# Altium PCB JACK_power_tester_(0).PcbDoc
Units mil, origin at the board's own origin, x right, y up, seen from the top; angles counter-clockwise.
Board outline 6000 x 4000 mil, 2 copper layers (Top Layer, Bottom Layer); 4 components, 0 nets, 44 pads, 0 vias.
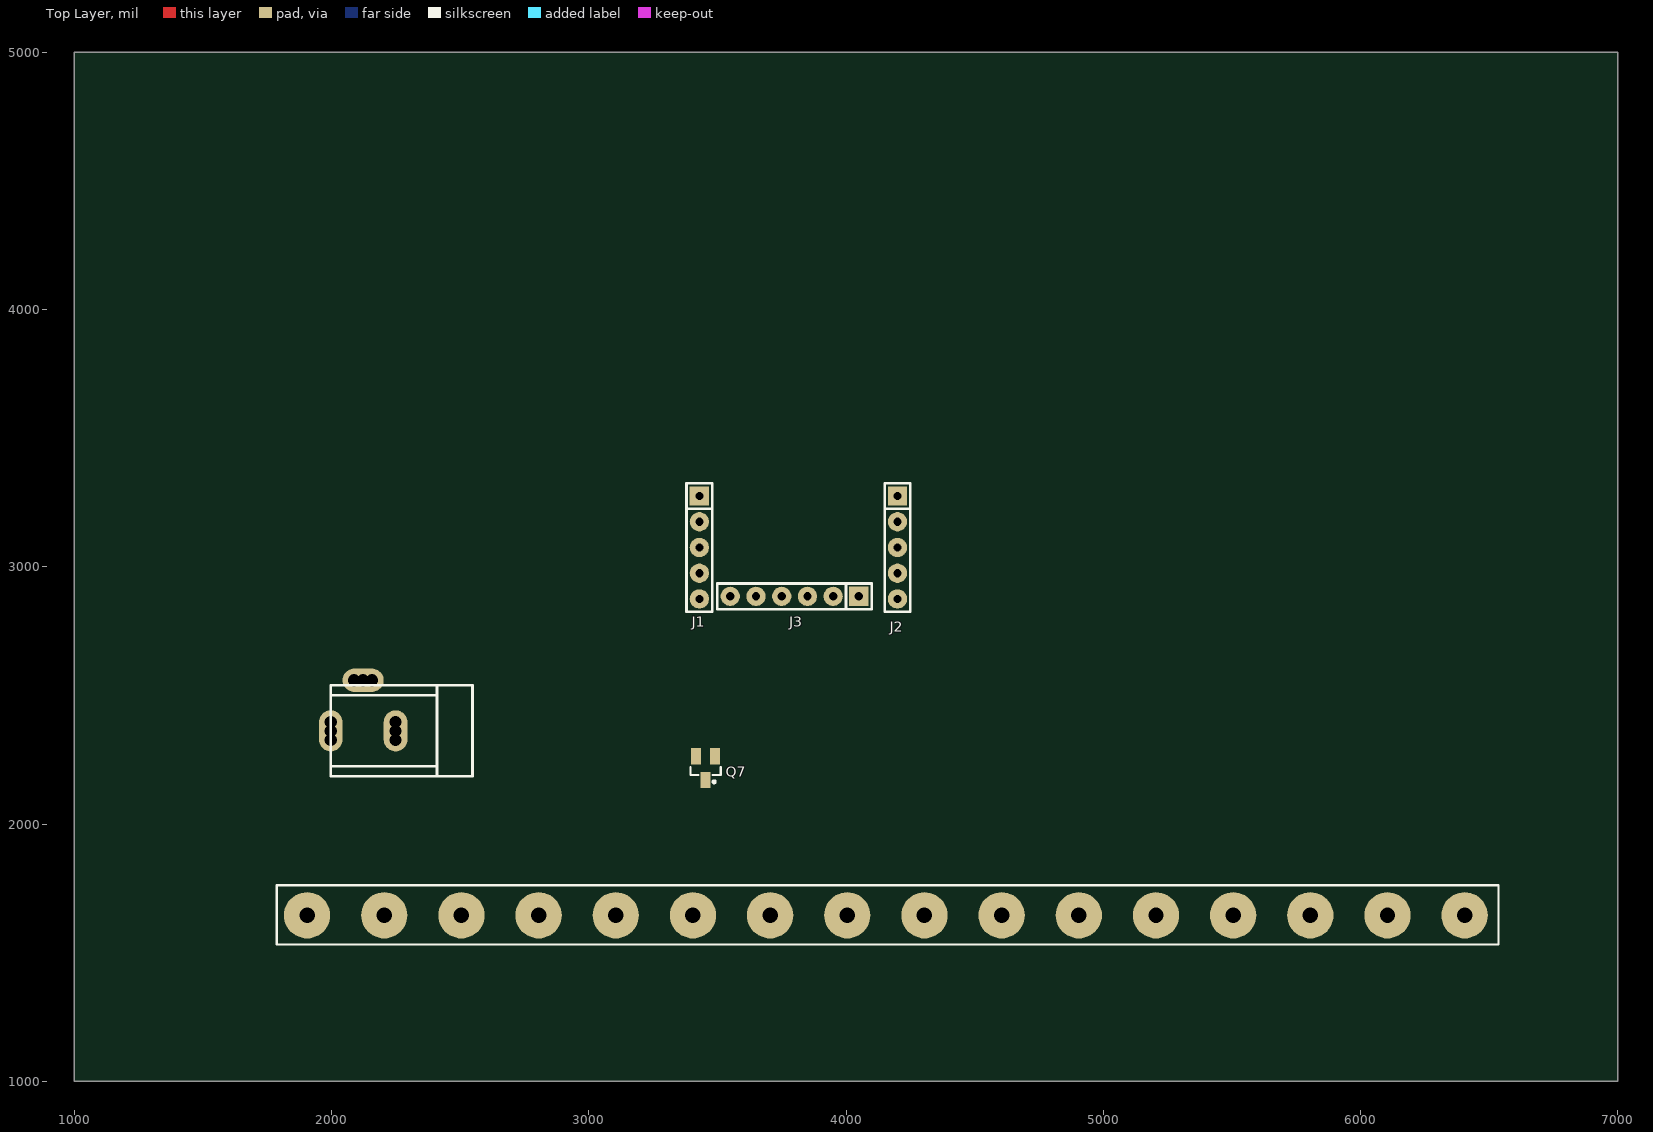
[diagram p0: Top Layer view]
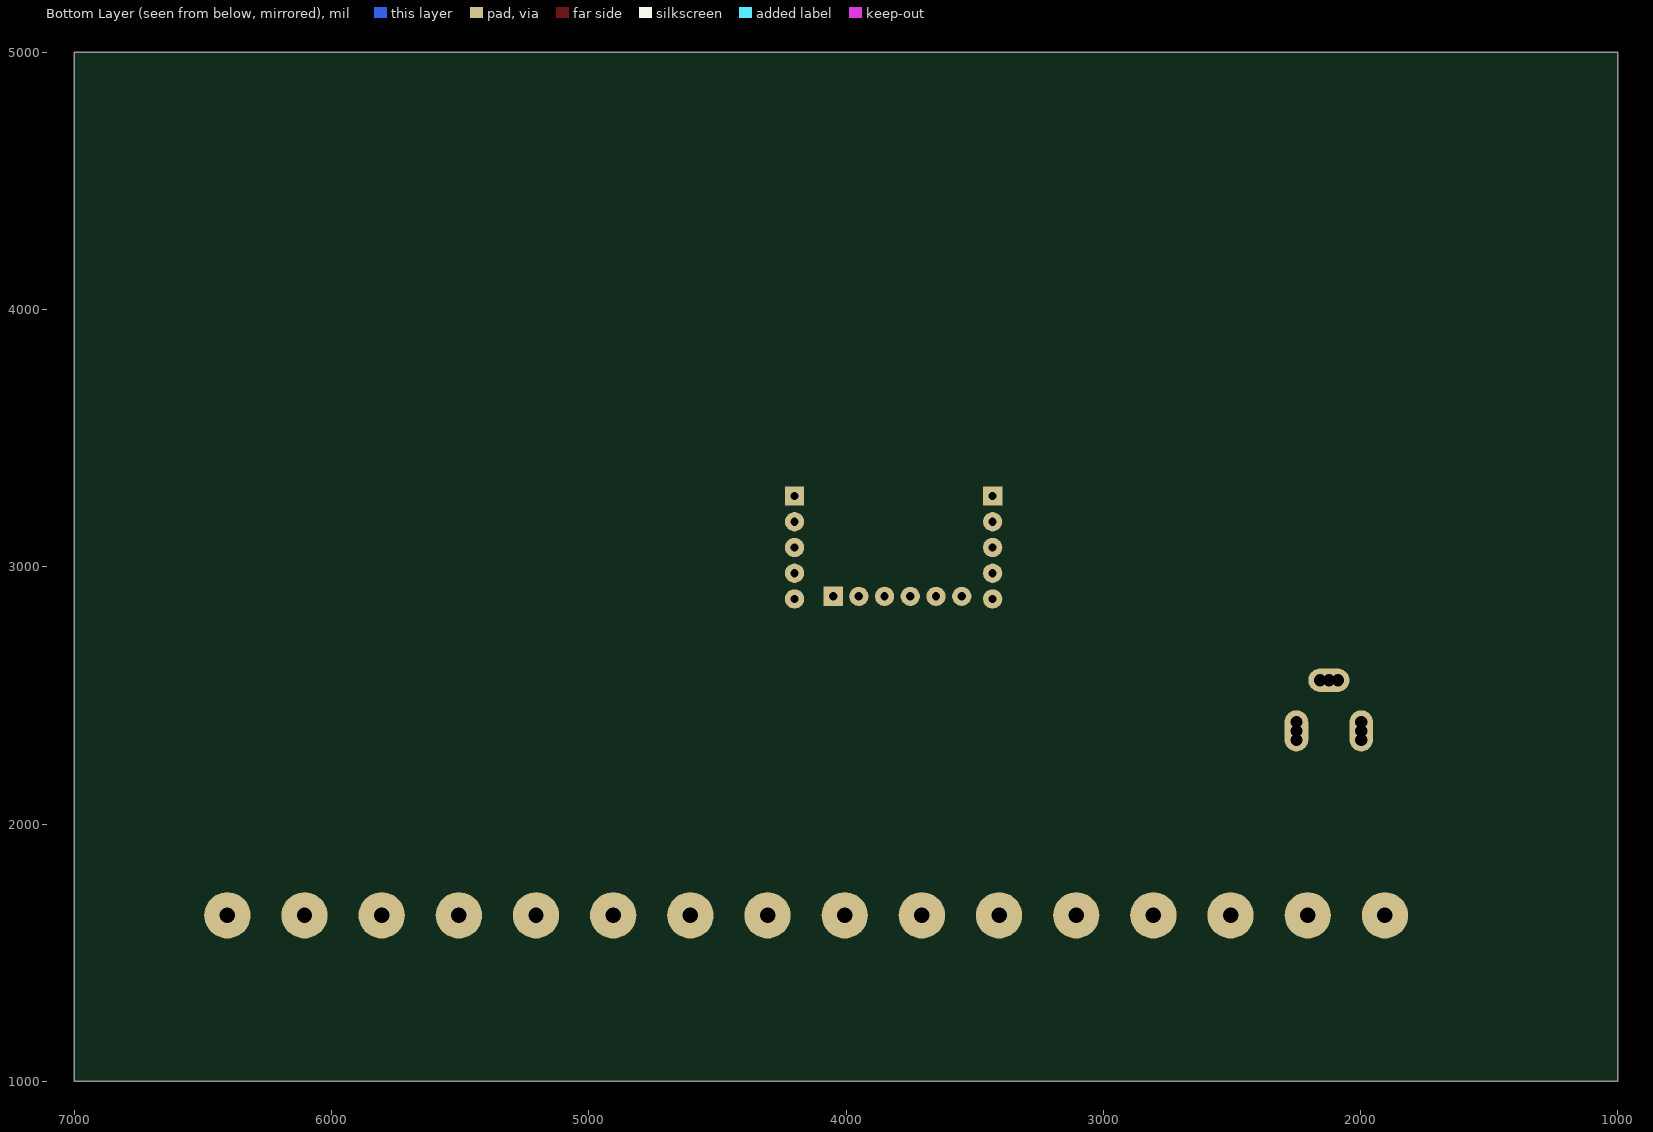
[diagram p1: Bottom Layer view, seen from below]

## Layer stack, top to bottom
Top Solder: solder mask 0.4, Solder Resist, Dk 3.5
Top Layer: signal copper 1.4
Dielectric 1: dielectric 12.6, FR-4, Dk 4.8
Bottom Layer: signal copper 1.4
Bottom Solder: solder mask 0.4, Solder Resist, Dk 3.5

## Board outline
1000,1000 7000,1000 7000,5000 1000,5000

## Design rules (kind name [scope] priority, off if disabled: settings)
Clearance [All] p1: gap=10
PolygonConnect [All] p1: connectstyle=Relief reliefconductorwidth=10 reliefentries=4 polygonreliefangle="90 Angle" airgapwidth=10
RoutingVias [All] p1: holewidth=28 width=50 viastyle="Through Hole" minholewidth=28 minwidth=50 maxholewidth=28 maxwidth=50
SolderMaskExpansion [All] p1: expansion=4
Width [All] p1: maxlimit=10 minlimit=10 preferedwidth=10
30 further rules are at their usual default settings.

## Components (designator, comment, footprint, x,y, rotation, side; value= is the part's Value field where it differs from the comment)
J1 "CON5" SIP5 3430,3075 r90 top
J2 "CON5" SIP5 4200,3075 r90 top
J3 "CON6" SIP6 3800,2885 r0 top
Q7 "2N2222" SOT23_M 3454,2217.26 r270 top

## Footprints (in the part's own frame and the unit in brackets; to place one, negate y for a bottom-side part, rotate by r counter-clockwise, add the part's x,y. Pads: shape width x height; smd on the part's side, far side on the other; paste and mask are expansions set on the pad)
SIP5 [mil]
  rect 75x75 hole 32: 1(200,0)
  round 75 hole 32: 2(100,0) 3(0,0) 4(-100,0) 5(-200,0)
  silkscreen extent -250,-50 250,50
SIP6 [mil]
  rect 75x75 hole 32: 1(250,0)
  round 75 hole 32: 2(150,0) 3(50,0) 4(-50,0) 5(-150,0) 6(-250,0)
  silkscreen extent -300,-50 300,50
SOT23_M [mm] "SOT23, 3-Leads, Body 2.9x1.3mm, Pitch 0.95mm, Lead Span 2.3mm - Reverse Pinning, IPC Low Density"
  rect 1.6x1 smd: 1(1.175,0) 2(-1.175,-0.95) 3(-1.175,0.95)
  silkscreen extent -0.1,-1.5 1.47,1.5, body extent -0.7,-1.5 0.7,1.5, height 1.1

## Part data
Q7: "General Purpose Transistor NPN Silicon"

## Free pads (board coordinates)
  round 180 hole 60: 1(1905,1645) 2(2205,1645) 3(2505,1645) 4(2805,1645) 5(3105,1645) 6(3405,1645) 7(3705,1645) 8(4005,1645) 9(4305,1645) 10(4605,1645) 11(4905,1645) 12(5205,1645) 13(5505,1645) 14(5805,1645) 15(6105,1645) 16(6405,1645)
  round 47 hole 47: 1(1997,2327) 1(1997,2397) 2(2088,2559) 2(2158,2559) 3(2249,2327) 3(2249,2397)
  oval 92x160 hole 47: 1(1997,2362) 3(2249,2362)
  oval 160x92 hole 47: 2(2123,2559)

## Nets (pads, with @x,y where several pads share a name; then routed paths per layer and width w, separated by ;. In a path a pad name is that pad's centre, name@x,y a point inside that pad or via, vN(x,y) a via of type N, cw(c..) or ccw(c..) an arc to the next point about the centre after c; other vN are vias at no path point)
pads on no net: J1.1 J1.2 J1.3 J1.4 J1.5 J2.1 J2.2 J2.3 J2.4 J2.5 J3.1 J3.2 J3.3 J3.4 J3.5 J3.6 Q7.1 Q7.2 Q7.3

## Silkscreen, mask and mechanical layers (free items; w line width, h text height)
Top Overlay:
  lines w8: 1787,1531 6536,1531 6536,1762 1787,1762 1787,1531
  lines w10: 1997,2224 2410,2224 ; 1997,2500 2410,2500 ; 2410,2185 2410,2539 ; 1997,2185 1997,2539 2548,2539 2548,2185 1997,2185